# EAGLE board Enclosure_Control (EAGLE 9.5.0)

Size 100 x 80 mm. Coordinates in mm from the lower left corner, seen from the top.
Outline: 0,0 100,0 100,80 0,80 0,0
Copper layers (1*16): Top 0.035mm / dielectric 1.5mm / Bottom 0.035mm
Design rules "default": minimum track width 6mil, minimum drill 0.35mm, track to track 6mil, track to pad 6mil, pad to pad 6mil, via to via 6mil, smd to smd 6mil, copper to edge 40mil, drill to drill 6mil, minimum pad ring 10mil, minimum via ring 8mil, stop-mask expansion 4mil, vias tented up to drill 0mil, thermal gap 10mil

## Footprints (pad centres in the part's own frame; a part is rotated, then mirrored left to right if it is on the bottom)
JST-XH-03-PACKAGE-LONG-PAD = drill 1.016 long: 1 -2.54,0; 2 0,0; 3 2.54,0
JST-XH-02-PACKAGE-LONG-PAD = drill 1.016 long: 1 -1.27,0; 2 1.27,0
JST-XH-04-PACKAGE-LONG-PAD = drill 1.016 long: 1 -3.81,0; 2 -1.27,0; 3 1.27,0; 4 3.81,0
KK-156-2 = drill 1.7 pad 2.184 long: 1 -1.98,0; 2 1.98,0
SCREWTERMINAL-3.5MM-3-NS = drill 1.2 pad 2.413: 1 0,0; 2 3.5,0; 3 7,0
ARDUINO-NANO-3.0 = drill 1 square: J1.1 17.78,7.62 | drill 1: J1.2 15.24,7.62; J1.3 12.7,7.62; J1.4 10.16,7.62; J1.5 7.62,7.62; J1.6 5.08,7.62; J1.7 2.54,7.62; J1.8 0,7.62; J1.9 -2.54,7.62; J1.10 -5.08,7.62; J1.11 -7.62,7.62; J1.12 -10.16,7.62; J1.13 -12.7,7.62; J1.14 -15.24,7.62; J1.15 -17.78,7.62; J2.1 17.78,-7.62; J2.2 15.24,-7.62; J2.3 12.7,-7.62; J2.4 10.16,-7.62; J2.5 7.62,-7.62; J2.6 5.08,-7.62; J2.7 2.54,-7.62; J2.8 0,-7.62; J2.9 -2.54,-7.62; J2.10 -5.08,-7.62; J2.11 -7.62,-7.62; J2.12 -10.16,-7.62; J2.13 -12.7,-7.62; J2.14 -15.24,-7.62; J2.15 -17.78,-7.62 | hole 1.651: -20.32,7.62; -20.32,-7.62; 20.32,-7.62; 20.32,7.62
TO220AH = drill 1.118 long: B -2.54,-6.35; C 0,-6.35; E 2.54,-6.35 | hole 3.302: 0,11.176
0309/12 = drill 0.813 octagon: 1 -6.35,0; 2 6.35,0

## Placement (x,y rotation side)
AM2302_A  JST-XH-03-PIN-LONG-PAD  [JST-XH-03-PACKAGE-LONG-PAD]  -48.26,52.07 0 top  (outside the outline)
AM2302_B  JST-XH-03-PIN-LONG-PAD  [JST-XH-03-PACKAGE-LONG-PAD]  -69.85,52.07 0 top  (outside the outline)
DOOR  JST-XH-02-PIN-LONG-PAD  [JST-XH-02-PACKAGE-LONG-PAD]  -27.94,60.96 0 top  (outside the outline)
ENCODER  JST-XH-04-PIN-LONG-PAD  [JST-XH-04-PACKAGE-LONG-PAD]  -25.4,52.07 0 top  (outside the outline)
FAN  [KK-156-2]  -55.88,30.48 0 top  (outside the outline)
I2C_AUX  JST-XH-04-PIN-LONG-PAD  [JST-XH-04-PACKAGE-LONG-PAD]  -46.99,60.96 0 top  (outside the outline)
J1  [SCREWTERMINAL-3.5MM-3-NS]  -72.39,29.21 0 top  (outside the outline)
LCD  JST-XH-04-PIN-LONG-PAD  [JST-XH-04-PACKAGE-LONG-PAD]  -68.58,60.96 0 top  (outside the outline)
M1  ARDUINO-NANO-3.0  [ARDUINO-NANO-3.0]  -35.56,12.7 0 top  (outside the outline)
Q1  IRF3704  [TO220AH]  -66.04,8.89 0 top  (outside the outline)
Q2  IRF3704  [TO220AH]  -20.32,33.02 0 top  (outside the outline)
Q3  IRF3704  [TO220AH]  -33.02,33.02 0 top  (outside the outline)
Q4  IRF3704  [TO220AH]  -45.72,33.02 0 top  (outside the outline)
R1  [0309/12]  -40.64,68.58 0 top  (outside the outline)
R2  10k  [0309/12]  -55.88,68.58 0 top  (outside the outline)
R3  10k  [0309/12]  -71.12,68.58 0 top  (outside the outline)
R4  10k  [0309/12]  -20.32,77.47 0 top  (outside the outline)
R5  10k  [0309/12]  -35.56,77.47 0 top  (outside the outline)
R6  [0309/12]  -50.8,77.47 0 top  (outside the outline)
RGB_LED  JST-XH-04-PIN-LONG-PAD  [JST-XH-04-PACKAGE-LONG-PAD]  -25.4,69.85 0 top  (outside the outline)

## Library data of the parts
AM2302_A AM2302_B DOOR ENCODER I2C_AUX LCD RGB_LED = Rembrandt Electronics - JST XH Connectors v1-0
FAN = con-molex; MF: MOLEX; OC_FARNELL: unknown; OC_NEWARK: unknown
J1 = SparkFun-Connectors
M1 = diy-modules
Q1-Q4 = transistor-power
R1-R6 = resistor

## Nets
3V3: M1.J2.14
5V: M1.J2.4
+5V: AM2302_A.1 AM2302_B.1 DOOR.1 I2C_AUX.1 J1.2 LCD.1 M1.J2.1
+12V: FAN.1 J1.3 RGB_LED.1
B_LED: M1.J1.6
DHT22_A: AM2302_A.3 M1.J1.11
DHT22_B: AM2302_B.3 M1.J1.10
DOOR_S: DOOR.2 M1.J1.7 R1.2
ENC_BUTT: M1.J1.14
ENC_CLK: M1.J1.5
ENC_DAT: M1.J1.15
FAN: M1.J1.13 R5.1
G_LED: M1.J1.8 R3.1 R4.1
GND: AM2302_A.2 AM2302_B.2 I2C_AUX.2 J1.1 LCD.2 M1.J2.2 Q4.E R1.1
GND.1: M1.J1.4
N$1: Q1.E Q2.E Q3.E
N$2: Q3.C RGB_LED.4
N$3: Q2.C RGB_LED.3
N$4: Q1.C RGB_LED.2
N$5: Q1.B R2.2
N$6: Q2.B R3.2
N$7: Q3.B R4.2
N$8: M1.J1.12
N$9: FAN.2 Q4.C
N$12: Q4.B R5.2
R_LED: M1.J1.9 R2.1
SCL: I2C_AUX.4 LCD.4 M1.J2.7
SDA: I2C_AUX.3 LCD.3 M1.J2.8

## Tracks (layer width: path | path; a pad name or v marks a point on that pad's centre or on a via)
+5V  (6 unrouted)
+12V  (2 unrouted)
DHT22_A  (1 unrouted)
DHT22_B  (1 unrouted)
DOOR_S  (2 unrouted)
FAN  (1 unrouted)
G_LED  (2 unrouted)
GND  (7 unrouted)
N$1  (2 unrouted)
N$2  (1 unrouted)
N$3  (1 unrouted)
N$4  (1 unrouted)
N$5  (1 unrouted)
N$6  (1 unrouted)
N$7  (1 unrouted)
N$9  (1 unrouted)
N$12  (1 unrouted)
R_LED  (1 unrouted)
SCL  (2 unrouted)
SDA  (2 unrouted)